# Altium PCB S7CAS-PLEIADES-CARTE-MERE_P02.PcbDoc (part 2 of 2)
Units mil, origin at the board's own origin, x right, y up, seen from the top; angles counter-clockwise.
Board outline 5000 x 5000 mil, 14 copper layers (Signal 1 (Top), GND 1, Signal 2, GND 2, 24V, GND 3, 3V3, GND 4, GND 5, POWER, GND 6, Signal 3, GND 7, Signal 4 (Bottom)), stack 60.6 mil thick; 20 components, 396 nets, 808 pads, 46 vias.
Unrouted connection lines stored in the file: 242.
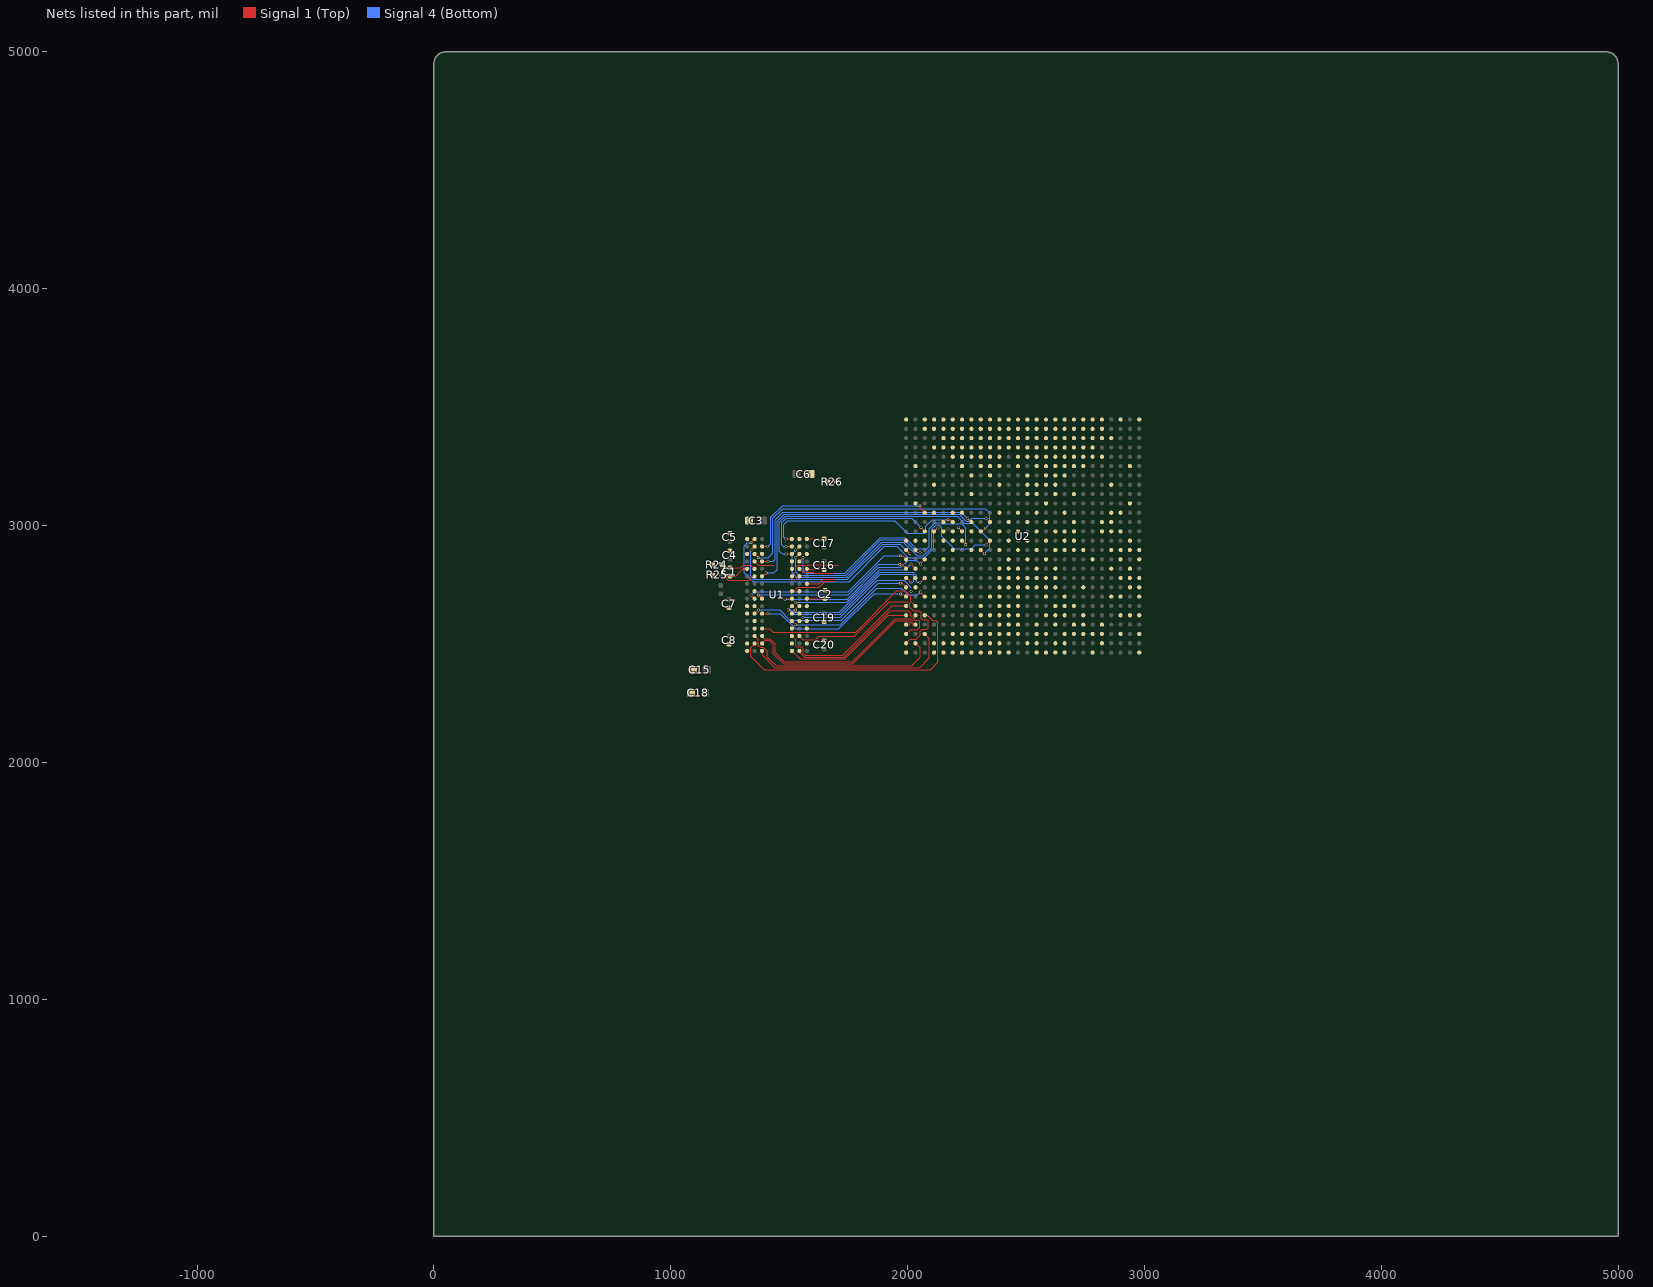
[diagram p11: the nets of this part, all layers, seen from the top]

## Via types
v1: diameter 12, hole 8, Signal 1 (Top) to Signal 4 (Bottom), 46 vias

## Nets (pads, with @x,y where several pads share a name; then routed paths per layer and width w, separated by ;. In a path a pad name is that pad's centre, name@x,y a point inside that pad or via, vN(x,y) a via of type N, cw(c..) or ccw(c..) an arc to the next point about the centre after c; other vN are vias at no path point) (continued)
DDR3.ODT: U1.K1 U2.P6 | length 124.4
  Signal 1 (Top) w5: U1.K1@1574.65,2754.37 1625.41,2754.37 1644.02,2772.98 1691.34,2772.98
DDR3.RASN: U1.J3 U2.N8 | length 196.7
  Signal 1 (Top) w5: U1.J3@1511.65,2722.87 1521.1,2722.87 1536.81,2738.58 1626.17,2738.58 1651.56,2763.98 1691.34,2763.98
DDR3.RESETN: R26.2 U1.T2 U2.L4
DDR3.UDM: U1.D3 U2.V4
DDR3.WEN: U1.L3 U2.P5 | length 228.8
  Signal 1 (Top) w5: U1.L3@1511.65,2785.87 1527.79,2802 1527.79,2823.72 1537.57,2833.5 1581.01,2833.5 1581.37,2833.86 1637.29,2833.86 1638.67,2832.48 1707.28,2832.48
DDR3_A0: U1.N3 U2.N7 | length 22
  Signal 1 (Top) w5: v1(2214.53,2991.14) U2.N7@2230.08,2975.59
DDR3_A1: U1.P7 U2.N6
  other v1: 2171.06,2985.24
DDR3_A2: U1.P3 U2.R9 | length 1208.4
  Signal 1 (Top) w5: v1(1486.61,2880.35) U1.P3@1511.65,2880.35 ; U2.R9@2308.82,2896.85 v1(2324.37,2881.3)
  Signal 4 (Bottom) w5: v1(1486.61,2880.35) 1486.38,2880.12 1470.67,2880.12 1458.73,2892.06 1458.73,3014.7 1483.21,3039.19 2208.78,3039.19 2238.95,3009.01 2275.24,3009.01 2346.85,2937.4 2346.85,2903.78 v1(2324.37,2881.3)
DDR3_A3: U1.N2 U2.P7 | length 1039.2
  Signal 1 (Top) w5: U1.N2@1543.15,2848.86 1543.15,2849.25 v1(1558.66,2864.76) ; U2.P7@2230.08,2936.22 v1(2245.63,2920.67)
  Signal 4 (Bottom) w5: v1(1558.66,2864.76) 1558.66,2812.38 1571.26,2799.78 1734.69,2799.78 1883.56,2948.65 1990.05,2948.65 2037.12,2901.57 2082.68,2901.57 2092.24,2911.13 2092.24,2987.44 2117.34,3012.54 2136.37,3012.54 2141.95,3006.96 2228.28,3006.96 2245.63,2989.61 v1(2245.63,2920.67)
DDR3_A4: U1.P8 U2.N9 | length 1274.7
  Signal 1 (Top) w5: U1.P8@1354.17,2880.35 1354.17,2880.22 1369.69,2864.7 v1(1369.69,2864.57) ; U2.N9@2308.82,2975.59 2314.37,2975.59 v1(2327.76,2988.98)
  Signal 4 (Bottom) w5: v1(1369.69,2864.57) 1370.08,2864.96 1412.2,2864.96 1431.73,2884.48 1431.73,3030.55 1472.54,3071.36 2328.84,3071.36 2346.65,3053.54 2346.65,3007.87 v1(2327.76,2988.98)
DDR3_A5: U1.P2 U2.R2 | length 720.8
  Signal 1 (Top) w5: v1(1527.17,2864.57) 1527.26,2864.57 U1.P2@1543.15,2880.35 U1.P2@1543.15,2880.35 ; U2.R2@2033.23,2896.85 2041.73,2888.35 2051.53,2888.35 v1(2052.87,2887.01)
  Signal 4 (Bottom) w5: v1(1527.17,2864.57) 1527.17,2805.12 1541.5,2790.78 1738.42,2790.78 1887.29,2939.65 1986.32,2939.65 2038.96,2887.01 v1(2052.87,2887.01)
DDR3_A6: U1.R8 U2.R1 | length 910.9
  Signal 1 (Top) w5: v1(1338.39,2896.26) 1338.48,2896.26 1354.07,2911.85 U1.R8@1354.17,2911.85 ; U2.R1@1993.86,2896.85 v1(2009.41,2881.3)
  Signal 4 (Bottom) w5: v1(1338.39,2896.26) 1338.39,2878.15 1336.81,2876.57 1336.81,2787.14 1351.17,2772.78 1746.17,2772.78 1895.04,2921.65 1969.06,2921.65 v1(2009.41,2881.3)
DDR3_A7: U1.R2 U2.P10 | length 1228.9
  Signal 1 (Top) w5: v1(1527.36,2896.26) 1527.46,2896.26 U1.R2@1543.15,2911.85 U1.R2@1543.15,2911.85 ; v1(2331.1,2918.31) 2331.1,2919.13 U2.P10@2348.19,2936.22
  Signal 4 (Bottom) w5: v1(1527.36,2896.26) 1512.4,2881.3 1512.4,2799.8 1530.43,2781.78 1742.41,2781.78 1891.28,2930.65 1982.59,2930.65 2040.07,2873.17 2067,2873.17 2101.24,2907.41 2101.24,2983.72 2121.06,3003.54 2132.64,3003.54 2145.08,2991.1 2145.08,2955.91 2198.03,2902.95 2270.28,2902.95 2285.63,2918.31 v1(2331.1,2918.31)
DDR3_A8: U1.T8 U2.N4 | length 1198.6
  Signal 1 (Top) w5: v1(1338.19,2927.56) 1338.39,2927.56 U1.T8@1354.17,2943.35 ; U2.N4@2111.97,2975.59 2126.73,2990.35 v1(2128.15,2990.35)
  Signal 4 (Bottom) w5: v1(1338.19,2927.56) 1337.8,2927.17 1323.23,2927.17 1310.83,2914.76 1310.83,2800.39 1347.44,2763.78 1753.15,2763.78 1902.02,2912.65 1954.87,2912.65 2003.35,2864.17 2070.73,2864.17 2110.24,2903.68 2110.24,2972.44 v1(2128.15,2990.35)
DDR3_A9: U1.R3 U2.N3 | length 775.3
  Signal 1 (Top) w5: v1(1486.61,2911.85) U1.R3@1511.65,2911.85 ; v1(2057.05,2991.14) U2.N3@2072.6,2975.59
  Signal 4 (Bottom) w5: v1(1486.61,2911.85) 1485.79,2911.02 1475.2,2911.02 1467.73,2918.49 1467.73,3010.97 1486.94,3030.19 2018,3030.19 v1(2057.05,2991.14)
DDR3_A10: U1.L7 U2.M10 | length 1214.9
  Signal 1 (Top) w5: U1.L7@1385.67,2785.87 1388.82,2785.87 v1(1402.95,2800) ; v1(2330.71,3030.51) 2346.26,3014.96 U2.M10@2348.19,3014.96
  Signal 4 (Bottom) w5: v1(1402.95,2800) 1435.43,2800 1449.73,2814.29 1449.73,3018.43 1479.48,3048.19 2217.21,3048.19 2247.38,3018.01 2257.74,3018.01 2270.24,3030.51 v1(2330.71,3030.51)
DDR3_A11: U1.R7 U2.L3 | length 842
  Signal 1 (Top) w5: U1.R7@1385.67,2911.85 v1(1408.46,2911.85) ; v1(2052.87,3083.86) 2054.21,3082.52 2054.21,3072.72 U2.L3@2072.6,3054.33
  Signal 4 (Bottom) w5: v1(1408.46,2911.85) 1408.82,2912.2 1412.01,2912.2 1422.73,2922.92 1422.73,3034.27 1473.1,3084.65 1742.32,3084.65 1743.11,3083.86 v1(2052.87,3083.86)
DDR3_A12: U1.N7 U2.M8 | length 1085.5
  Signal 1 (Top) w5: U1.N7@1385.67,2848.86 v1(1411.02,2848.86) ; v1(2252.56,3030.51) 2268.11,3014.96 U2.M8@2269.45,3014.96
  Signal 4 (Bottom) w5: v1(1411.02,2848.86) 1411.38,2849.21 1432.34,2849.21 1440.73,2857.6 1440.73,3024.78 1473.13,3057.19 2225.89,3057.19 v1(2252.56,3030.51)
DDR3_A13: U1.T3 U2.M6 | length 872.8
  Signal 1 (Top) w5: v1(1486.61,2943.51) 1486.7,2943.43 1511.57,2943.43 U1.T3@1511.65,2943.35 ; v1(2171.06,3024.8) 2180.87,3024.8 U2.M6@2190.71,3014.96
  Signal 4 (Bottom) w5: v1(1486.61,2943.51) 1486.43,2943.7 1484.25,2943.7 1476.73,2951.23 1476.73,3004.13 1493.78,3021.19 1944.88,3021.19 1997.56,2968.5 2066.93,2968.5 2076.67,2978.25 2076.67,2997.74 2103.74,3024.8 v1(2171.06,3024.8)
DDR3_BA0: U1.M2 U2.P3 | length 155.2
  Signal 1 (Top) w5: U1.M2@1543.15,2817.36 1558.51,2802 1600.75,2802 1605.06,2797.69 1690.02,2797.69 1690.16,2797.83
DDR3_BA1: U1.N8 U2.P1 | length 88.7
  Signal 1 (Top) w5: U1.N8@1354.17,2848.86 1369.76,2833.27 1436.42,2833.27
DDR3_BA2: U1.M3 U2.N5
DDR3_DQ0: U1.E3 U2.Y3 | length 656.7
  Signal 1 (Top) w4: U1.E3@1512.3,2596.89 U1.E3@1511.65,2596.89 1527.44,2581.1 v1(1527.56,2581.1) ; v1(2053.74,2719.09) 2053.74,2718.86 U2.Y3@2072.6,2700
  Signal 4 (Bottom) w4: v1(1527.56,2581.1) 1714.96,2581.1 1869.09,2735.24 1974.02,2735.24 2002.16,2707.09 2041.74,2707.09 v1(2053.74,2719.09)
DDR3_DQ1: U1.F7 U2.Y1 | length 701.2
  Signal 1 (Top) w4: U1.F7@1385.67,2628.39 v1(1410.63,2628.39) ; v1(1971.26,2711.61) 1972.79,2710.08 1982.93,2710.08 1993.01,2700 U2.Y1@1993.86,2700
  Signal 4 (Bottom) w4: v1(1410.63,2628.39) 1463.31,2628.39 1528.11,2563.58 1710.43,2563.58 1858.46,2711.61 v1(1971.26,2711.61)
DDR3_DQ2: U1.F2 U2.W2 | length 531
  Signal 4 (Bottom) w4: v1(1558.86,2612.4) 1716.34,2612.4 1872.24,2768.31 1986.02,2768.31 2013.78,2740.55
  other v1: 2014.76,2721.26
DDR3_DQ3: U1.F8 U2.W1 | length 735.7
  Signal 1 (Top) w4: U1.F8@1354.17,2628.39 1369.69,2643.9 v1(1370.08,2643.9) ; v1(1970.47,2756.3) 1976.93,2756.3 U2.W1@1993.86,2739.37
  Signal 4 (Bottom) w4: v1(1370.08,2643.9) 1460.04,2643.9 1503.54,2600.4 1719.3,2600.4 1875.2,2756.3 v1(1970.47,2756.3)
DDR3_DQ4: U1.H3 U2.T3 | length 705.6
  Signal 1 (Top) w5: v1(1481.89,2689.17) 1482.99,2690.28 1510.55,2690.28 U1.H3@1511.65,2691.38 ; v1(2053.94,2837.8) 2053.94,2838.31 2072.6,2856.97 U2.T3@2072.6,2857.48
  Signal 4 (Bottom) w5: v1(1481.89,2689.17) 1482.68,2689.96 1744.65,2689.96 1878.21,2823.52 1971.91,2823.52 2002.91,2854.53 2037.2,2854.53 v1(2053.94,2837.8)
DDR3_DQ5: U1.H8 U2.T1 | length 752.5
  Signal 1 (Top) w5: v1(1338.44,2706.69) 1338.65,2706.69 1353.97,2691.38 U1.H8@1354.17,2691.38 ; v1(1970.47,2872.64) 1978.7,2872.64 U2.T1@1993.86,2857.48
  Signal 4 (Bottom) w5: v1(1338.44,2706.69) 1353.01,2721.26 1750.49,2721.26 1901.87,2872.64 v1(1970.47,2872.64)
DDR3_DQ6: U1.G2 U2.U2 | length 608.2
  Signal 1 (Top) w5: v1(1527.36,2675.39) 1527.64,2675.39 U1.G2@1543.15,2659.88 U1.G2@1546.59,2659.88 ; v1(2015.16,2837.99) 2015.16,2836.18 U2.U2@2033.23,2818.11
  Signal 4 (Bottom) w5: v1(1527.36,2675.39) 1527.56,2675.59 1743,2675.59 1881.94,2814.52 1991.69,2814.52 v1(2015.16,2837.99)
DDR3_DQ7: U1.H7 U2.U1 | length 712.7
  Signal 1 (Top) w5: v1(1369.69,2707.28) U1.H7@1388.78,2688.19 ; v1(1966.73,2836.02) 1975.94,2836.02 U2.U1@1993.86,2818.11
  Signal 4 (Bottom) w5: v1(1369.69,2707.28) 1369.29,2707.68 1749.63,2707.68 1877.98,2836.02 v1(1966.73,2836.02)
DDR3_DQ8: U1.D7 U2.AA2 | length 764.5
  Signal 1 (Top) w4: U1.D7@1385.67,2565.39 1417.28,2565.39 1432.14,2550.54 1780.28,2550.54 1954.26,2724.51 1990.36,2724.51 2012.99,2701.88 2012.99,2680.87 U2.AA2@2033.23,2660.63
DDR3_DQ9: U1.C3 U2.AA1 | length 626.6
  Signal 1 (Top) w4: U1.C3@1511.65,2533.9 1528.23,2517.32 1528.23,2493.43 1534.11,2487.54 1551.63,2487.54 1559.06,2480.12 1559.06,2461.81 1568.11,2452.76 1726.38,2452.76 1802.28,2528.66 1934.25,2660.63 U2.AA1@1993.86,2660.63
DDR3_DQ10: U1.C8 U2.AE2 | length 861.5
  Signal 1 (Top) w4: U1.C8@1354.17,2533.9 1370.47,2517.6 1370.47,2493.5 1377.56,2486.42 1391.17,2486.42 1407.68,2469.91 1407.68,2445.08 1444.63,2408.13 2016.79,2408.13 2052.87,2444.21 2052.87,2483.51 U2.AE2@2033.23,2503.15
DDR3_DQ11: U1.C2 U2.AE1 | length 833.5
  Signal 1 (Top) w4: U1.C2@1543.15,2533.9 1558.54,2518.5 1611.48,2518.5 1625.46,2532.48 1775.79,2532.48 1922.44,2679.13 1999.41,2679.13 2008.72,2669.83 2008.72,2655.26 2023.03,2640.94 2048.43,2640.94 2057.74,2631.63 2057.74,2608.6 2063.78,2602.56 2083.27,2602.56 2087.46,2598.37 2087.46,2567.97 2081.69,2562.2 2061.22,2562.2 2053.07,2554.05 2053.07,2537.12 2036.06,2520.12 2010.83,2520.12 U2.AE1@1993.86,2503.15
DDR3_DQ12: U1.A7 U2.AD3 | length 871.8
  Signal 1 (Top) w4: U1.A7@1385.67,2470.91 1385.67,2453.9 1439.44,2400.13 2050.72,2400.13 2091.93,2441.34 2091.93,2523.19 U2.AD3@2072.6,2542.52
DDR3_DQ13: U1.A2 U2.AD1 | length 719.4
  Signal 1 (Top) w4: U1.A2@1543.15,2470.91 1543.15,2467.19 1551.06,2459.29 1551.06,2458.5 1564.8,2444.76 1731.44,2444.76 1926.65,2639.96 2002.95,2639.96 2013.78,2629.13 2013.78,2619.7 2032.69,2600.79 2046.46,2600.79 2050.39,2596.85 2050.39,2570.47 2041.14,2561.22 2012.56,2561.22 U2.AD1@1993.86,2542.52
DDR3_DQ14: U1.B8 U2.AB3 | length 1122.7
  Signal 1 (Top) w4: U1.B8@1354.17,2502.4 1354.17,2501.02 1337.99,2484.84 1337.99,2449.05 1394.92,2392.13 2096.85,2392.13 2128.26,2423.54 2128.26,2426.85 2126.83,2428.29 2126.83,2592.66 2118.87,2600.62 2104.3,2600.62 2083.66,2621.26 U2.AB3@2072.6,2621.26
DDR3_DQ15: U1.A3 U2.AB1 | length 572.8
  Signal 1 (Top) w4: U1.A3@1511.65,2470.91 1545.8,2436.76 1734.76,2436.76 1919.26,2621.26 U2.AB1@1993.86,2621.26
ETH_LED#: 
FLASH_CS: U2.AC22
FLASH_MISO: U2.AD20
GA0: U2.M23
GA1: U2.N24
GND: C1.1 C2.1 C3.1 C4.1 C5.1 C6.1 C7.1 C8.1 C15.1 C16.1 C17.1 C18.1 C19.1 C20.1 R24.1 R25.1 R26.1 U1.A9 U1.B1 U1.B3 U1.B9 U1.D1 U1.D8 U1.E1 U1.E2 U1.E8 U1.F9 U1.G1 U1.G8 U1.G9 U1.J2 U1.J8 U1.L2 U1.M1 U1.M9 U1.P1 U1.P9 U1.T1 U1.T9 U2.A1 U2.A3 U2.A26 U2.AB2 U2.AB12 U2.AB16 U2.AB20 U2.AB25 U2.AC8 U2.AE6 U2.AE10 U2.AE14 U2.AE18 U2.AE22 U2.AF1 U2.AF26 U2.B5 U2.B9 U2.B13 U2.B17 U2.B21 U2.D4 U2.E7 U2.E11 U2.E15 U2.E22 U2.F2 U2.F19 U2.F25 U2.H4 U2.H11 U2.H23 U2.J8 U2.J19 U2.K2 U2.K16 U2.K25 U2.L11 U2.L13 U2.L15 U2.M5 U2.M12 U2.M14 U2.M16 U2.M22 U2.N11 U2.N13 U2.N15 U2.P2 U2.P12 U2.P14 U2.P16 U2.P19 U2.P25 U2.R8 U2.R11 U2.R13 U2.R15 U2.T5 U2.T12 U2.T14 U2.T16 U2.T21 U2.U11 U2.V2 U2.V25 U2.W15 U2.W20 U2.Y4 U2.Y7 U2.Y11 U2.Y23 | length 273.1
  Signal 1 (Top) w4: U1.M1@1574.65,2817.36 1576.23,2815.78 1646.05,2815.78 C16.1@1647.64,2814.19 ; U1.T1@1574.65,2943.35 1574.81,2943.51 1647.47,2943.51 C17.1@1647.64,2943.68
  Signal 1 (Top) w5: C1.1@1250,2786.63 1274.14,2786.63 1304.87,2817.36 U1.M9@1322.68,2817.36 ; 1509.25,2770.47 1524.8,2770.47 1540.2,2785.87 U1.L2@1543.15,2785.87
HA00_CC_n: U2.AD13
HA00_CC_p: U2.AC13
HA01_CC_n: U2.AF12
HA01_CC_p: U2.AD12
HA02_n: U2.Y13
HA02_p: U2.W13
HA03_n: U2.AB13
HA03_p: U2.AA13
HA04_n: U2.AC12
HA04_p: U2.AA12
HA05_n: U2.V14
HA05_p: U2.U15
HA06_n: U2.AB11
HA06_p: U2.AA11
HA07_n: U2.W14
HA07_p: U2.V13
HA08_n: U2.AD11
HA08_p: U2.AC11
HA09_n: U2.W12
HA09_p: U2.V12
HA10_n: U2.AF11
HA10_p: U2.AE11
HA11_n: U2.AF9
HA11_p: U2.AE9
HA12_n: U2.AF10
HA12_p: U2.AD10
HA13_n: U2.U12
HA13_p: U2.U13
HA14_n: U2.AB10
HA14_p: U2.Y10
HA15_n: U2.W11
HA15_p: U2.V11
HA16_n: U2.AF8
HA16_p: U2.AD8
HA17_CC_n: U2.W16
HA17_CC_p: U2.V15
HA18_n: U2.AD9
HA18_p: U2.AC9
HA19_n: U2.AB9
HA19_p: U2.AA9
HA20_n: U2.AF7
HA20_p: U2.AE7
HA21_n: U2.AF6
HA21_p: U2.AD6
HA22_n: U2.AF5
HA22_p: U2.AE5
HA23_n: U2.AF4
HA23_p: U2.AE4
HB00_CC_n: U2.A13
HB00_CC_p: U2.C13
HB01_n: U2.A4
HB01_p: U2.B4
HB02_n: U2.D5
HB02_p: U2.E6
HB03_n: U2.A5
HB03_p: U2.C5
HB04_n: U2.F7
HB04_p: U2.G8
HB05_n: U2.A6
HB05_p: U2.B6
HB06_CC_n: U2.C14
HB06_CC_p: U2.D14
HB07_n: U2.A7
HB07_p: U2.C7
HB08_n: U2.C6
HB08_p: U2.D6
HB09_n: U2.D7
HB09_p: U2.E8
HB10_n: U2.C8
HB10_p: U2.D8
HB11_n: U2.E9
HB11_p: U2.F9
HB12_n: U2.A8
HB12_p: U2.B8
HB13_n: U2.A9
HB13_p: U2.C9
HB14_n: U2.F10
HB14_p: U2.E10
HB15_n: U2.C10
HB15_p: U2.D10
HB16_n: U2.A10
HB16_p: U2.B10
HB17_CC_n: U2.A14
HB17_CC_p: U2.B14
HB18_n: U2.F11
HB18_p: U2.D11
HB19_n: U2.A11
HB19_p: U2.C11
HB20_n: U2.A12
HB20_p: U2.B12
HB21_n: U2.C12
HB21_p: U2.D12
ISO_JTAG_TCK: 
ISO_JTAG_TDI: 
ISO_JTAG_TDO: 
ISO_JTAG_TMS: 
ISO_UART_CTS#: 
ISO_UART_RTS#: 
ISO_UART_RXD: 
ISO_UART_TXD: 
JTAG_TCK: U2.E21
JTAG_TDI: U2.F20
JTAG_TDO: U2.A24
JTAG_TMS: U2.C23
LA00_CC_n: U2.A15
LA00_CC_p: U2.C15
LA01_CC_n: U2.A16
LA01_CC_p: U2.B16
LA02_n: U2.G14
LA02_p: U2.J14
LA03_n: U2.D15
LA03_p: U2.E14
LA04_n: U2.C16
LA04_p: U2.D16
LA05_n: U2.F15
LA05_p: U2.G16
LA06_n: U2.E17
LA06_p: U2.F17
LA07_n: U2.E16
LA07_p: U2.F16
LA08_n: U2.A17
LA08_p: U2.C17
LA09_n: U2.H15
LA09_p: U2.J15
LA10_n: U2.C18
LA10_p: U2.D18
LA11_n: U2.D19
LA11_p: U2.E19
LA12_n: U2.G17
LA12_p: U2.H16
LA13_n: U2.C20
LA13_p: U2.D21
LA14_n: U2.E18
LA14_p: U2.F18
LA15_n: U2.D20
LA15_p: U2.E20
LA16_n: U2.H17
LA16_p: U2.J17
LA17_CC_n: U2.B18
LA17_CC_p: U2.A18
LA18_CC_n: U2.C19
LA18_CC_p: U2.A19
LA19_n: U2.B20
LA19_p: U2.A20
LA20_n: U2.C21
LA20_p: U2.A21
LA21_n: U2.B22
LA21_p: U2.A22
LA22_n: U2.D13
LA22_p: U2.F13
LA23_n: U2.AD15
LA23_p: U2.AC15
LA24_n: U2.AC17
LA24_p: U2.AB17
LA25_n: U2.AF15
LA25_p: U2.AE15
LA26_n: U2.AF17
LA26_p: U2.AE17
LA27_n: U2.AB18
LA27_p: U2.AA18
LA28_n: U2.AA17
LA28_p: U2.Y16
LA29_n: U2.AF18
LA29_p: U2.AD18
LA30_n: U2.W17
LA30_p: U2.V16
LA31_n: U2.AD19
LA31_p: U2.AC19
LA32_n: U2.AA19
LA32_p: U2.Y18
LA33_n: U2.AD21
LA33_p: U2.AC20
LDQS_N: U1.G3 U2.V1 | length 705.3
  Signal 1 (Top) w4: v1(1495.87,2644.09) 1511.26,2659.49 1511.65,2659.49 U1.G3@1511.65,2659.88 ; U2.V1@1993.86,2778.74 2012.6,2760 v1(2012.6,2759.65)
  Signal 4 (Bottom) w4: v1(1495.87,2644.09) 1505.47,2644.09 1508.54,2641.03 1508.54,2634.4 1517.86,2625.07 1715.82,2625.07 1885.63,2794.88 2021.06,2794.88 2026.97,2788.98 2026.97,2765.55 2022.59,2761.18 2014.13,2761.18 v1(2012.6,2759.65)
LDQS_P: U1.F3 U2.V3 | length 708.1
  Signal 1 (Top) w4: U1.F3@1511.65,2628.39 1511.85,2628.39 1527.56,2644.09 v1(1527.76,2644.09) ; v1(2053.15,2759.45) 2053.31,2759.45 U2.V3@2072.6,2778.74
  Signal 4 (Bottom) w4: v1(1527.76,2644.09) 1518.7,2644.09 1516.54,2641.93 1516.54,2637.71 1521.18,2633.07 1712.51,2633.07 1882.32,2802.88 2024.38,2802.88 2036.42,2790.84 2036.42,2765.55 2041.15,2760.82 2051.78,2760.82 v1(2053.15,2759.45)
MOTOR_DECAY: U2.U23
MOTOR_DIR: U2.R19
MOTOR_HOME: U2.P18
MOTOR_STEP: U2.R20
MOTOR_USM0: U2.R17
MOTOR_USM1: U2.R18
Net*1_7: 
NetC44_1: 
NetC44_2: 
NetC45_1: 
NetC58_2: 
NetC59_2: 
NetC63_2: 
NetC74_2: 
NetC75_2: 
NetC76_2: 
NetC113_2: 
NetC114_1: 
NetC115_1: 
NetC116_1: 
NetC116_2: 
NetC119_2: 
NetC120_2: 
NetC138_2: 
NetC143_2: 
NetC148_2: 
NetC170_2: 
NetC171_1: 
NetC176_2: 
NetD8_A: 
NetD9_A: 
NetD10_A: 
NetD11_A: 
NetD12_A: 
NetF1_1: 
NetJ2_4: 
NetJ2_7: 
NetJ2_10: 
NetJ2_12: 
NetJ3_1: 
NetJ3_2: 
NetJ3_3: 
NetJ3_4: 
NetR24_2: R24.2 U1.L8 | length 197.1
  Signal 1 (Top) w5: R24.2@1212.38,2835.63 1213.13,2834.88 1213.13,2819.88 1233.5,2799.51 1233.5,2777.46 1240.82,2770.13 1259.18,2770.13 1328.67,2770.14 1344.4,2785.87 U1.L8@1354.17,2785.87
NetR27_1: 
NetR29_2: 
NetR30_1: 
NetR31_2: 
NetR32_2: 
NetR33_2: 
NetR34_2: 
NetR35_2: 
NetR36_2: 
NetR37_2: 
NetR38_2: 
NetR39_2: 
NetR40_2: 
NetR41_2: 
NetR45_2: 
NetR46_2: 
NetR47_1: 
NetR49_1: 
NetR51_1: 
NetR52_1: 
NetR53_1: 
NetR54_1: 
NetR55_1: 
NetR57_1: 
NetR62_2: 
NetR63_2: 
NetR67_2: 
NetR75_1: 
NetR77_1: 
NetR79_1: 
NetR79_2: 
PG_C2M: U2.L23
PG_M2C: U2.L24
PGOOD: 
PHY_1V2: 
PHY_3V3_A: 
PHY_25MHz: U2.U25
PHY_COL: U2.V26
PHY_CRS: U2.T24
PHY_INTR: U2.V24
PHY_MDC: U2.W26
PHY_MDIO: U2.W25
PHY_RXC: U2.Y26
PHY_RXD0: U2.AD24
PHY_RXD1: U2.AD26
PHY_RXD2: U2.AB24
PHY_RXD3: U2.AB26
PHY_RXDV: U2.T26
PHY_RXER: U2.Y24
PHY_TXC: U2.N19
PHY_TXD0: U2.N17
PHY_TXD1: U2.N18
PHY_TXD2: U2.R23
PHY_TXD3: U2.R24
PHY_TXEN: U2.N23
PHY_TXER: U2.N22
PLL_LOCK: U2.AF16
PRST#: U2.AD16
RD_n: 
RD_p: 
RX_n: 
RX_p: 
SCL: U2.V17
SDA: U2.U17
SLP_S3: U2.L7
SPI_CLK: U2.AD22
SPI_MOSI: U2.AF21
TD_n: 
TD_p: 
TX_n: 
TX_p: 
UART_CTS#: U2.R26
UART_RTS#: U2.L18
UART_RXD: U2.R25
UART_TXD: U2.M19
UDQS_N: U1.B7 U2.AC1 | length 796.6
  Signal 1 (Top) w4: U1.B7@1385.67,2502.4 1398.43,2515.16 1415.16,2515.16 1433.27,2497.05 1433.27,2459.06 1476.2,2416.13 1768.69,2416.13 1950.96,2598.4 2005.51,2598.4 2010.24,2593.68 2010.24,2585.63 2006.5,2581.89 U2.AC1@1993.86,2581.89
UDQS_P: U1.C7 U2.AC2 | length 810.3
  Signal 1 (Top) w4: U1.C7@1385.67,2533.9 1385.67,2532.6 1395.11,2523.16 1418.47,2523.16 1441.27,2500.36 1441.27,2462.37 1479.51,2424.13 1765.37,2424.13 1947.65,2606.4 2011.71,2606.4 2018.7,2599.41 2018.7,2584.65 2021.46,2581.89 U2.AC2@2033.23,2581.89
USB_3V3: 
USB_5V: 
USB_GND: 
VADJ: 
VCC1_PLL: 
VCC2_PLL: 
VCC_IN_PRI: 
VCC_IN_SEC: 
VCC_VCO: 
VIO_B_M2C: U2.B3 U2.B7 U2.B11 U2.B15 U2.B19 U2.C22 U2.D9 U2.D17 U2.E13 U2.G10 U2.G18 U2.H14
VREF_0V75: C1.2 C2.2 U1.H1 U1.M8 U2.AD7 U2.L6 U2.R6 U2.V6 | length 192.4
  Signal 1 (Top) w5: C1.2@1250,2821.63 1295.06,2821.63 1306.15,2832.72 1338.81,2832.72 U1.M8@1354.17,2817.36 ; U1.H1@1574.65,2691.38 1575.03,2691.76 1651.19,2691.76 C2.2@1651.57,2692.15
VREF_3P3V: 
VREF_A: 
VREF_B: 
pads on no net: U1.J1 U1.J9 U1.L1 U1.L9 U1.M7 U1.T7 U2.A2 U2.A23 U2.A25 U2.AA3 U2.AA4 U2.AA5 U2.AA7 U2.AA8 U2.AA20 U2.AA22 U2.AA23 U2.AA24 U2.AA25 U2.AA26 U2.AB4 U2.AB5 U2.AB6 U2.AB7 U2.AB8 U2.AB19 U2.AB21 U2.AB22 U2.AC3 U2.AC4 U2.AC5 U2.AC7 U2.AC23 U2.AC24 U2.AC25 U2.AC26 U2.AD4 U2.AD5 U2.AD17 U2.AD23 U2.AE3 U2.AE21 U2.AE23 U2.AE24 U2.AE25 U2.AE26 U2.AF2 U2.AF22 U2.AF23 U2.AF24 U2.AF25 U2.B1 U2.B2 U2.B23 U2.B24 U2.B25 U2.B26 U2.C1 U2.C2 U2.C3 U2.C4 U2.C24 U2.C25 U2.C26 U2.D1 U2.D2 U2.D3 U2.D22 U2.D23 U2.D24 U2.D25 U2.D26 U2.E1 U2.E2 U2.E3 U2.E4 U2.E5 U2.E12 U2.E23 U2.E24 U2.E25 U2.E26 U2.F1 U2.F3 U2.F4 U2.F5 U2.F8 U2.F12 U2.F14 U2.F22 U2.F23 U2.F24 U2.F26 U2.G1 U2.G2 U2.G3 U2.G4 U2.G5 U2.G6 U2.G7 U2.G9 U2.G11 U2.G13 U2.G19 U2.G20 U2.G21 U2.G22 U2.G23 U2.G24 U2.G25 U2.G26 U2.H1 U2.H2 U2.H3 U2.H5 U2.H6 U2.H7 U2.H8 U2.H9 U2.H10 U2.H12 U2.H13 U2.H18 U2.H19 U2.H20 U2.H21 U2.H22 U2.H24 U2.H25 U2.H26 U2.J1 U2.J2 U2.J3 U2.J4 U2.J5 U2.J6 U2.J7 U2.J10 U2.J11 U2.J12 U2.J13 U2.J16 U2.J20 U2.J21 U2.J22 U2.J23 U2.J24 U2.J25 U2.J26 U2.K1 U2.K3 U2.K4 U2.K5 U2.K6 U2.K7 U2.K8 U2.K9 U2.K10 U2.K12 U2.K14 U2.K15 U2.K18 U2.K19 U2.K20 U2.K21 U2.K22 U2.K23 U2.K24 U2.K26 U2.L1 U2.L2 U2.L8 U2.L9 U2.L17 U2.L19 U2.L20 U2.L21 U2.L25 U2.L26 U2.M1 U2.M2 U2.M3 U2.M4 U2.M24 U2.M25 U2.M26 U2.N1 U2.N2 U2.N21 U2.N25 U2.N26 U2.P20 U2.P24 U2.P26 U2.R5 U2.R7 U2.R10 U2.T4 U2.T6 U2.T8 U2.T9 U2.T10 U2.T18 U2.T19 U2.T20 U2.T23 U2.U3 U2.U4 U2.U5 U2.U7 U2.U8 U2.U9 U2.U19 U2.U20 U2.U21 U2.U22 U2.U24 U2.U26 U2.V5 U2.V7 U2.V8 U2.V10 U2.V18 U2.V19 U2.V20 U2.V22 U2.W5 U2.W7 U2.W8 U2.W9 U2.W10 U2.W18 U2.W19 U2.W21 U2.W22 U2.Y5 U2.Y6 U2.Y8 U2.Y9 U2.Y20 U2.Y21 U2.Y22
copper on no net: | length 19957.1
  Signal 1 (Top) w5: 0,0 0,4950 cw(c50,4950) 50,5000 4950,5000 cw(c4950,4950) 5000,4950 5000,0 0,0

## Polygon pours and split planes (outlines as drawn)
no net on GND 1 (split plane): 4954.69,4979.62 4959.27,4978.52 4963.62,4976.72 4967.63,4974.26 4971.21,4971.21 4974.26,4967.63 4976.72,4963.62 4978.52,4959.27 4979.62,4954.69 4979.95,4950.5 4979.9,4950 4979.9,20.1 20.1,20.1 20.1,4950 20.05,4950.5 20.38,4954.69 21.48,4959.27 23.28,4963.62 25.74,4967.63 28.79,4971.21 32.37,4974.26 36.38,4976.72 40.73,4978.52 45.31,4979.62 49.5,4979.95 50,4979.9 4950,4979.9 4950.5,4979.95
no net on GND 2 (split plane): 4954.69,4979.62 4959.27,4978.52 4963.62,4976.72 4967.63,4974.26 4971.21,4971.21 4974.26,4967.63 4976.72,4963.62 4978.52,4959.27 4979.62,4954.69 4979.95,4950.5 4979.9,4950 4979.9,20.1 20.1,20.1 20.1,4950 20.05,4950.5 20.38,4954.69 21.48,4959.27 23.28,4963.62 25.74,4967.63 28.79,4971.21 32.37,4974.26 36.38,4976.72 40.73,4978.52 45.31,4979.62 49.5,4979.95 50,4979.9 4950,4979.9 4950.5,4979.95
no net on 24V (split plane): 4954.69,4979.62 4959.27,4978.52 4963.62,4976.72 4967.63,4974.26 4971.21,4971.21 4974.26,4967.63 4976.72,4963.62 4978.52,4959.27 4979.62,4954.69 4979.95,4950.5 4979.9,4950 4979.9,20.1 20.1,20.1 20.1,4950 20.05,4950.5 20.38,4954.69 21.48,4959.27 23.28,4963.62 25.74,4967.63 28.79,4971.21 32.37,4974.26 36.38,4976.72 40.73,4978.52 45.31,4979.62 49.5,4979.95 50,4979.9 4950,4979.9 4950.5,4979.95
no net on GND 3 (split plane): 4954.69,4979.62 4959.27,4978.52 4963.62,4976.72 4967.63,4974.26 4971.21,4971.21 4974.26,4967.63 4976.72,4963.62 4978.52,4959.27 4979.62,4954.69 4979.95,4950.5 4979.9,4950 4979.9,20.1 20.1,20.1 20.1,4950 20.05,4950.5 20.38,4954.69 21.48,4959.27 23.28,4963.62 25.74,4967.63 28.79,4971.21 32.37,4974.26 36.38,4976.72 40.73,4978.52 45.31,4979.62 49.5,4979.95 50,4979.9 4950,4979.9 4950.5,4979.95
no net on 3V3 (split plane): 4954.69,4979.62 4959.27,4978.52 4963.62,4976.72 4967.63,4974.26 4971.21,4971.21 4974.26,4967.63 4976.72,4963.62 4978.52,4959.27 4979.62,4954.69 4979.95,4950.5 4979.9,4950 4979.9,20.1 20.1,20.1 20.1,4950 20.05,4950.5 20.38,4954.69 21.48,4959.27 23.28,4963.62 25.74,4967.63 28.79,4971.21 32.37,4974.26 36.38,4976.72 40.73,4978.52 45.31,4979.62 49.5,4979.95 50,4979.9 4950,4979.9 4950.5,4979.95
no net on GND 4 (split plane): 4954.69,4979.62 4959.27,4978.52 4963.62,4976.72 4967.63,4974.26 4971.21,4971.21 4974.26,4967.63 4976.72,4963.62 4978.52,4959.27 4979.62,4954.69 4979.95,4950.5 4979.9,4950 4979.9,20.1 20.1,20.1 20.1,4950 20.05,4950.5 20.38,4954.69 21.48,4959.27 23.28,4963.62 25.74,4967.63 28.79,4971.21 32.37,4974.26 36.38,4976.72 40.73,4978.52 45.31,4979.62 49.5,4979.95 50,4979.9 4950,4979.9 4950.5,4979.95
no net on POWER (split plane): 4954.69,4979.62 4959.27,4978.52 4963.62,4976.72 4967.63,4974.26 4971.21,4971.21 4974.26,4967.63 4976.72,4963.62 4978.52,4959.27 4979.62,4954.69 4979.95,4950.5 4979.9,4950 4979.9,20.1 20.1,20.1 20.1,4950 20.05,4950.5 20.38,4954.69 21.48,4959.27 23.28,4963.62 25.74,4967.63 28.79,4971.21 32.37,4974.26 36.38,4976.72 40.73,4978.52 45.31,4979.62 49.5,4979.95 50,4979.9 4950,4979.9 4950.5,4979.95
no net on GND 6 (split plane): 4954.69,4979.62 4959.27,4978.52 4963.62,4976.72 4967.63,4974.26 4971.21,4971.21 4974.26,4967.63 4976.72,4963.62 4978.52,4959.27 4979.62,4954.69 4979.95,4950.5 4979.9,4950 4979.9,20.1 20.1,20.1 20.1,4950 20.05,4950.5 20.38,4954.69 21.48,4959.27 23.28,4963.62 25.74,4967.63 28.79,4971.21 32.37,4974.26 36.38,4976.72 40.73,4978.52 45.31,4979.62 49.5,4979.95 50,4979.9 4950,4979.9 4950.5,4979.95
no net on GND 7 (split plane): 4954.69,4979.62 4959.27,4978.52 4963.62,4976.72 4967.63,4974.26 4971.21,4971.21 4974.26,4967.63 4976.72,4963.62 4978.52,4959.27 4979.62,4954.69 4979.95,4950.5 4979.9,4950 4979.9,20.1 20.1,20.1 20.1,4950 20.05,4950.5 20.38,4954.69 21.48,4959.27 23.28,4963.62 25.74,4967.63 28.79,4971.21 32.37,4974.26 36.38,4976.72 40.73,4978.52 45.31,4979.62 49.5,4979.95 50,4979.9 4950,4979.9 4950.5,4979.95

## Silkscreen, mask and mechanical layers (free items; w line width, h text height)
Top Overlay:
  rectangle: -1261.38,2160.75 -752.79,2464.02
  lines w5: -1520,3460 -1520,3700 -430,3700 -430,3460 -1520,3460
  text "0" at -1322.86,4100 h787.4
  text ".Project_Name" at -1928.77,3700 h78.74
  text ".Project_Global" at -1478.77,3480 h39.37
  text ".Project_Revision" at -1340,3306.31 h40
  text "Revision" at -1243.7,3306.31 h40
  text ".Project_DateCode" at -1310,3240 h40
  text "Designed by:" at -1266,3100 h36
  text ".Project_Designer1" at -1313.15,3050.76 h36
  text ".Project_Designer2" at -1313.15,2980.51 h36
  text ".Project_Designer3" at -1313.15,2910.25 h36
  text ".Project_Designer4" at -1313.15,2840 h36
  text "Serial #" at -1264.6,2447.17 h39.37